# Altium PCB PCB1.PcbDoc
Units mm, origin at the board's own origin, x right, y up, seen from the top; angles counter-clockwise.
Board outline 91.57 x 98.81 mm, 2 copper layers (Top Layer, Bottom Layer); 2 components, 2 nets, 84 pads, 4 vias.
Unrouted connection lines stored in the file: 2.
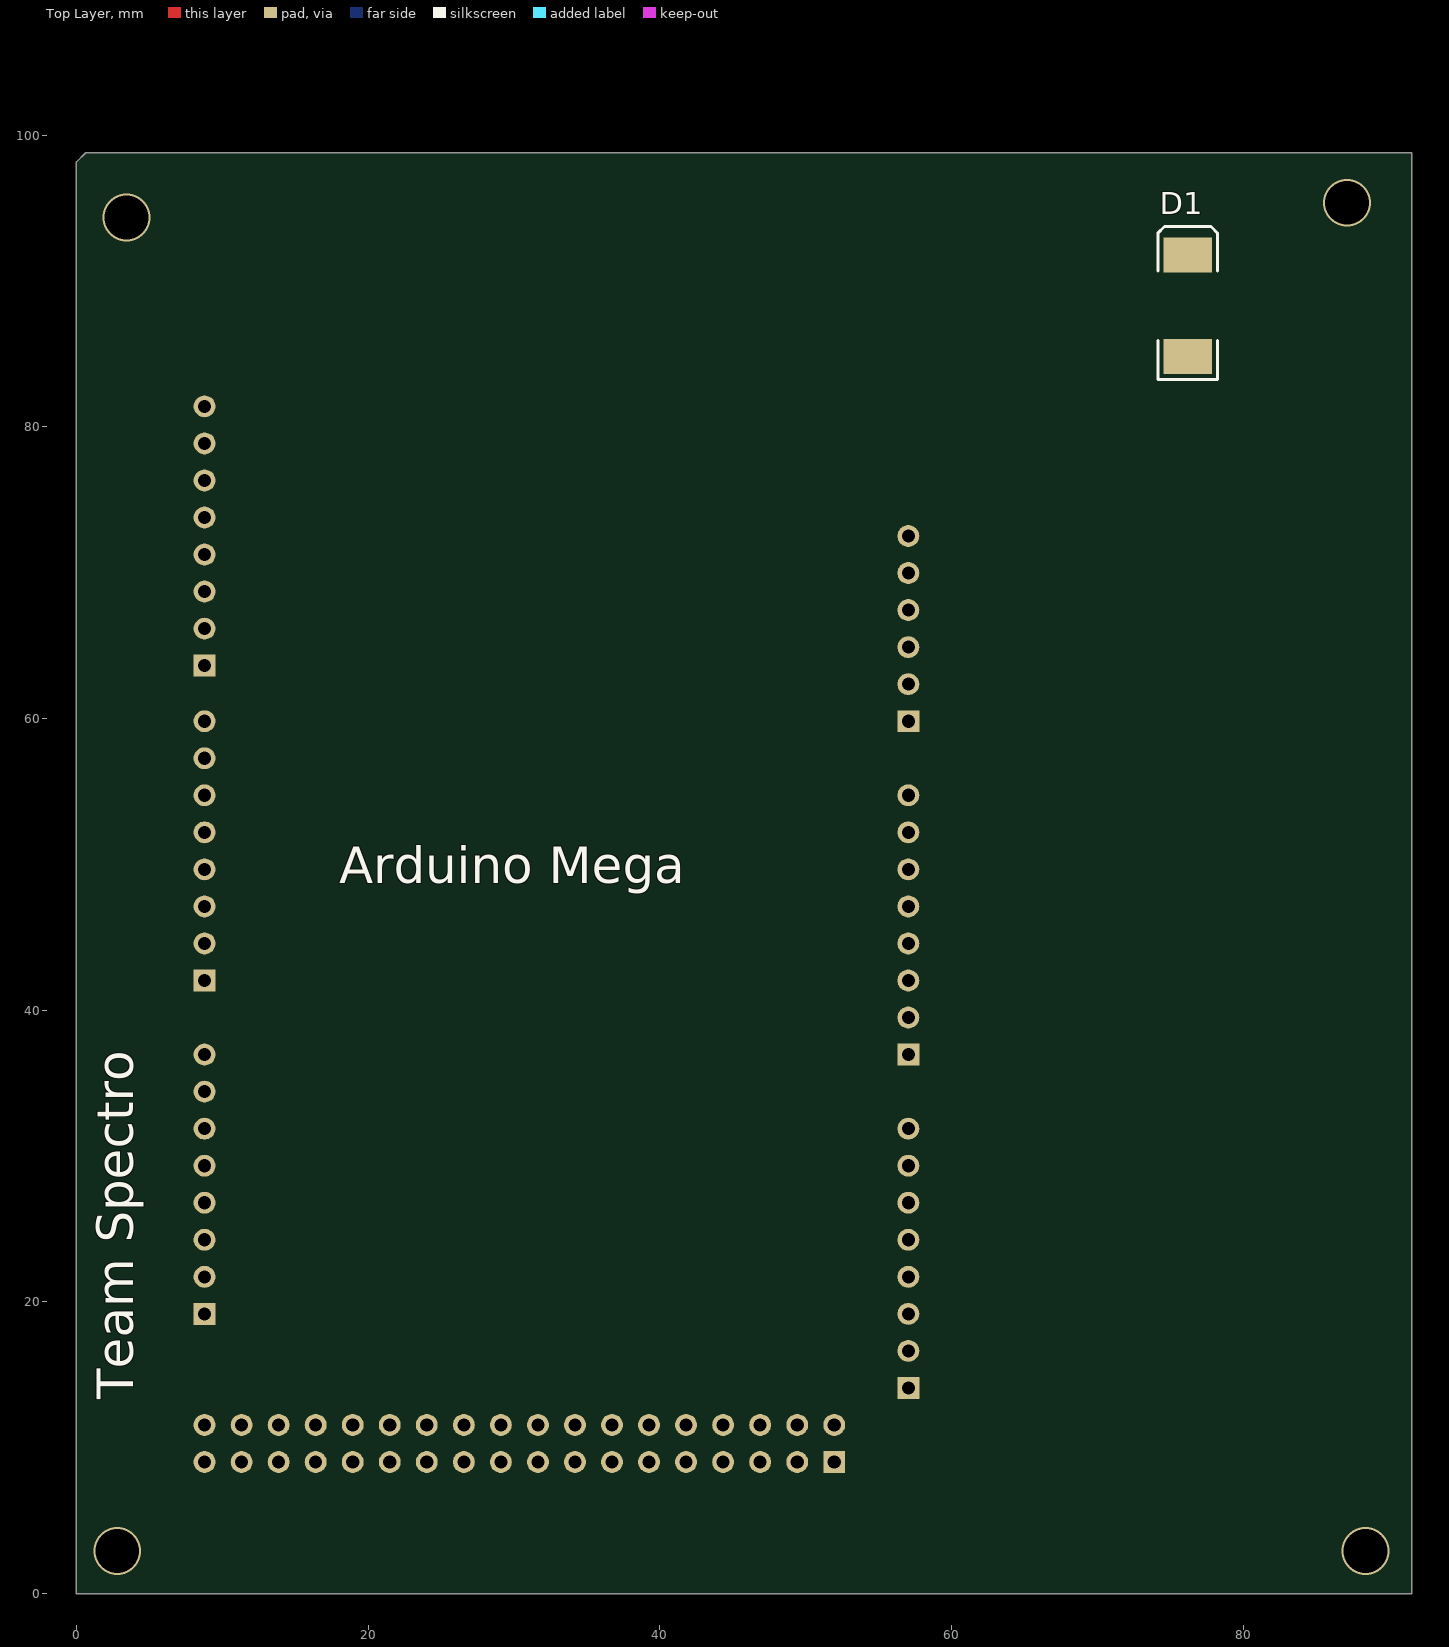
[diagram p0: Top Layer view]
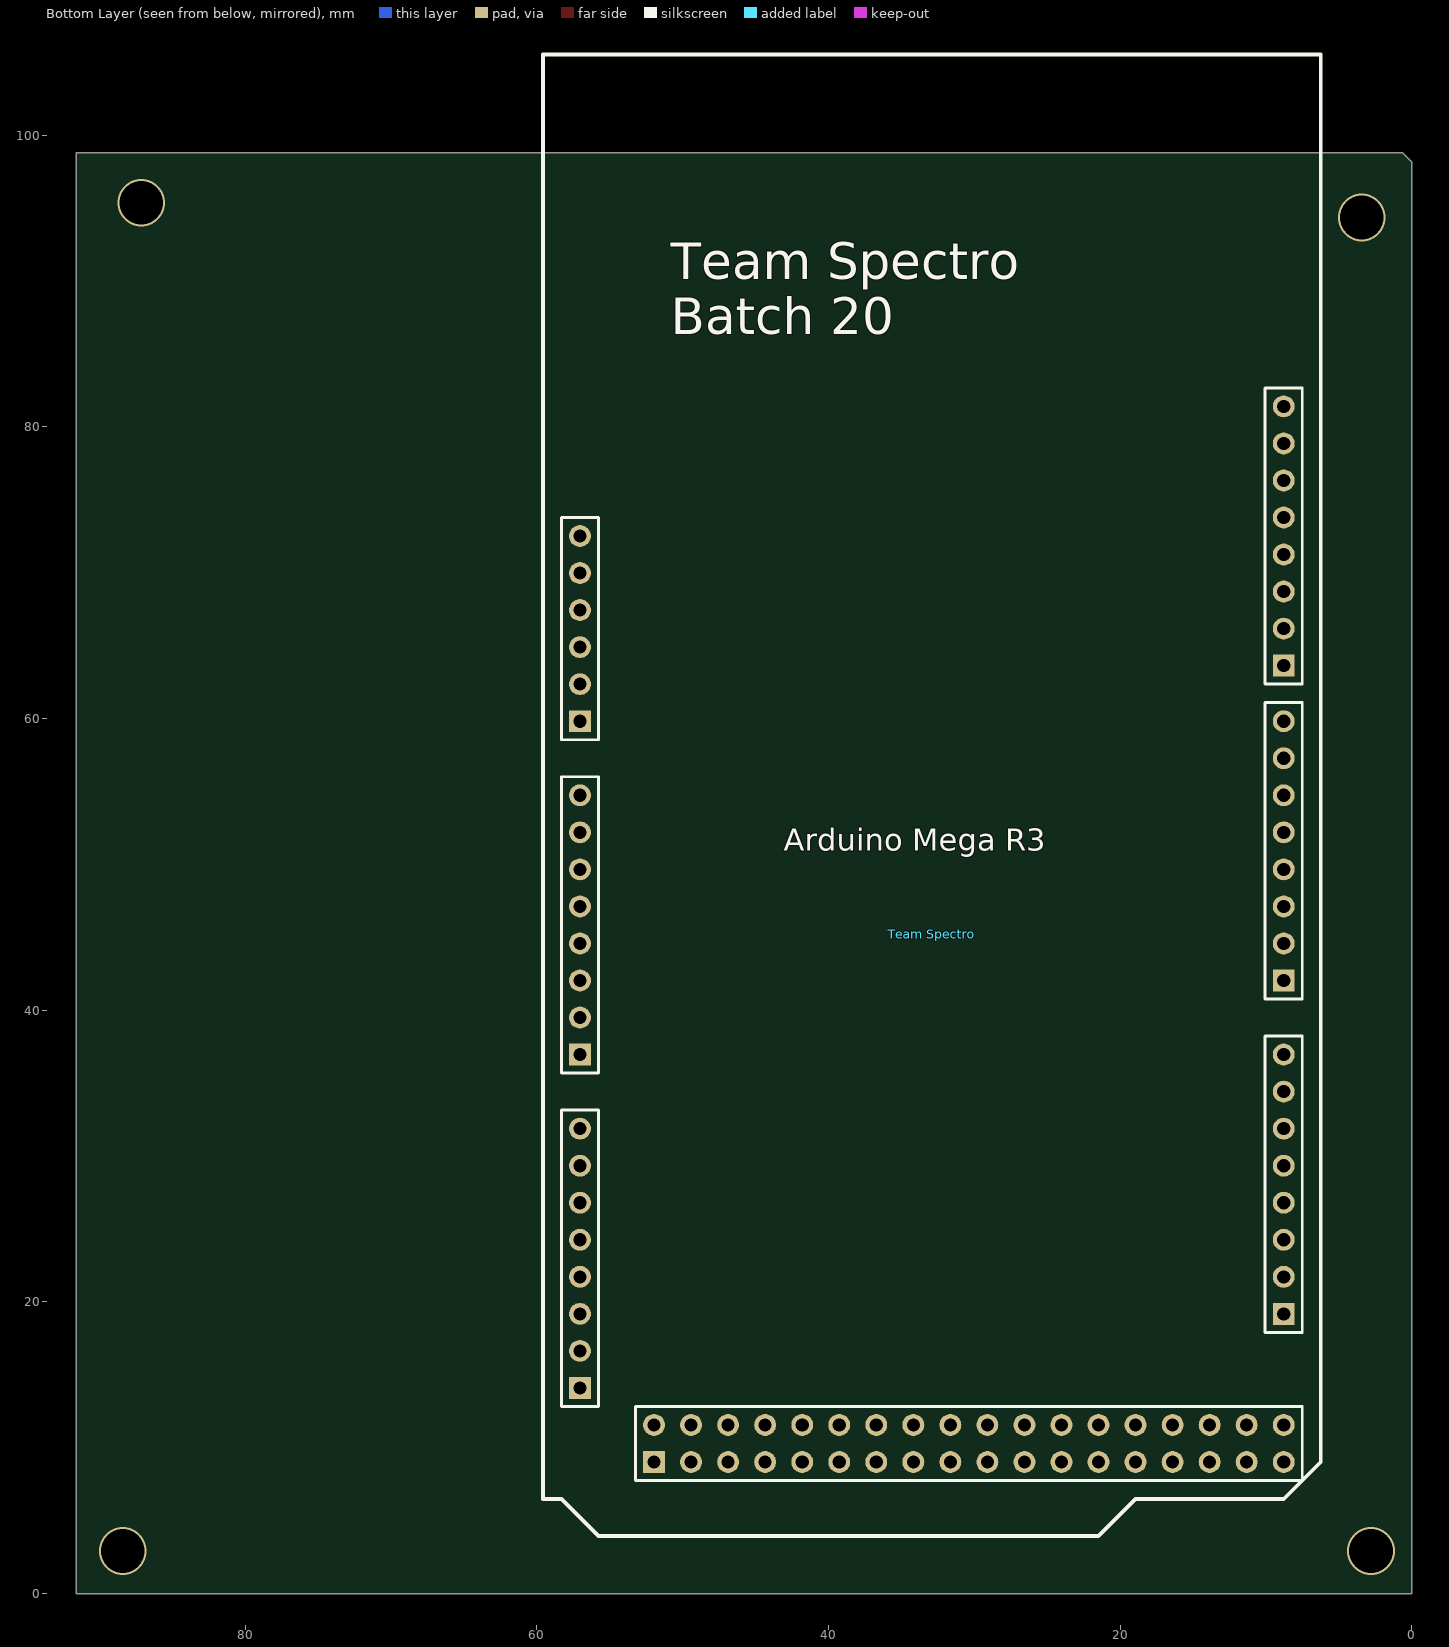
[diagram p1: Bottom Layer view, seen from below]

## Layer stack, top to bottom
Top Solder: solder mask 0.0102, Solder Resist, Dk 3.5
Top Layer: signal copper 0.0356
Dielectric 1: dielectric 0.32, FR-4, Dk 4.8
Bottom Layer: signal copper 0.0356
Bottom Solder: solder mask 0.0102, Solder Resist, Dk 3.5

## Board outline
0,0 0,98.171 0.635,98.806 91.567,98.806 91.567,0

## Design rules (kind name [scope] priority, off if disabled: settings)
Clearance [All] p1: gap=0.254 ignorepadtopadclearanceinfootprint=FALSE except(0: Arc-Hole Track-Hole SMDPad-Hole THPad-Hole Via-Hole Fill-Hole Poly-Hole Region-Hole Text-Hole)
PolygonConnect [All] p1: connectstyle=Relief reliefconductorwidth=0.254 reliefentries=4 polygonreliefangle="90 Angle" airgapwidth=0.254
RoutingVias [All] p1: holewidth=0.711 width=1.27 viastyle="Through Hole" minholewidth=0.711 minwidth=1.27 maxholewidth=0.711 maxwidth=1.27
SolderMaskExpansion [All] p1: expansion=0.102 istentingtop=FALSE
Width [All] p1: maxlimit=0.254 minlimit=0.254 preferedwidth=0.254
30 further rules are at their usual default settings.

## Components (designator, comment, footprint, x,y, rotation, side; value= is the part's Value field where it differs from the comment)
D1 "Diode" SMC 76.2,88.311 r90 top
"Team Spectro" "*" "Arduino Mega" 31.642,52.197 r270 bottom (schematic designator "Arduino Mega")

## Footprints (in the part's own frame and the unit in brackets; to place one, negate y for a bottom-side part, rotate by r counter-clockwise, add the part's x,y. Pads: shape width x height; smd on the part's side, far side on the other; paste and mask are expansions set on the pad)
"Arduino Mega" [mm] "Arduino Mega 2560"
  rect 1.5x1.5 hole 0.9: 0(10.16,22.86) 8(-11.43,22.86) 21(33.02,22.86) 59(-7.62,-25.4) 67(15.24,-25.4) 75(38.1,-25.4) 79(43.18,-20.32)
  round 1.5 hole 0.9: 1(7.62,22.86) 2(5.08,22.86) 3(2.54,22.86) 4(0,22.86) 5(-2.54,22.86) 6(-5.08,22.86) 7(-7.62,22.86) 9(-13.97,22.86) 10(-16.51,22.86) 11(-19.05,22.86) 12(-21.59,22.86) 13(-24.13,22.86) 14(15.24,22.86) 15(17.78,22.86) 16(20.32,22.86) 17(22.86,22.86) 18(25.4,22.86) 19(27.94,22.86) 20(30.48,22.86) 22(40.64,20.32) 23(43.18,20.32) 24(40.64,17.78) 25(43.18,17.78) 26(40.64,15.24) 27(43.18,15.24) 28(40.64,12.7) 29(43.18,12.7) 30(40.64,10.16) 31(43.18,10.16) 32(40.64,7.62) 33(43.18,7.62) 34(40.64,5.08) 35(43.18,5.08) 36(40.64,2.54) 37(43.18,2.54) 38(40.64,0) 39(43.18,0) 40(40.64,-2.54) 41(43.18,-2.54) 42(40.64,-5.08) 43(43.18,-5.08) 44(40.64,-7.62) 45(43.18,-7.62) 46(40.64,-10.16) 47(43.18,-10.16) 48(40.64,-12.7) 49(43.18,-12.7) 50(40.64,-15.24) 51(43.18,-15.24) 52(40.64,-17.78) 53(43.18,-17.78) 54(-20.32,-25.4) 55(-17.78,-25.4) 56(-15.24,-25.4) 57(-12.7,-25.4) 58(-10.16,-25.4) 60(-2.54,-25.4) 61(0,-25.4) 62(2.54,-25.4) 63(5.08,-25.4) 64(7.62,-25.4) 65(10.16,-25.4) 66(12.7,-25.4) 68(20.32,-25.4) 69(22.86,-25.4) 70(25.4,-25.4) 71(27.94,-25.4) 72(30.48,-25.4) 73(33.02,-25.4) 74(35.56,-25.4) 76(-26.67,22.86) 77(-29.21,22.86) 78(40.64,-20.32) 80(43.18,22.86) 81(40.64,22.86)
  silkscreen extent -53.34,-27.94 48.26,25.4
SMC [mm] "DO-214-AB/SMC; 2 C-Bend Leads; Body 7.9 x 5.9 mm, inc. leads (LxW)"
  rect 2.4x3.3 smd: 1(-3.475,0) 2(3.475,0)
  silkscreen extent -5.07,-2.05 5.43,2.05

## Part data
D1: "Default Diode", Code_JEDEC=DO-214-AB, LatestRevisionDate=17-Jul-2002, LatestRevisionNote="Re-released for DXP Platform.", PackageDescription="DO-214-AB/SMC; 2 C-Bend Leads; Body 7.9 x 5.9 mm, inc. leads (LxW)", PackageReference=SMC, PackageVersion=Sep-1996, Published=8-Jun-2000, Publisher="Altium Limited"
"Team Spectro": library part "ARDUINO MEGA"

## Via types
v1: diameter 3.27, hole 3, Top Layer to Bottom Layer, 4 vias

## Nets (pads, with @x,y where several pads share a name; then routed paths per layer and width w, separated by ;. In a path a pad name is that pad's centre, name@x,y a point inside that pad or via, vN(x,y) a via of type N, cw(c..) or ccw(c..) an arc to the next point about the centre after c; other vN are vias at no path point)
"NetArduino Mega?_11": "Team Spectro.11" D1.1
"NetArduino Mega?_77": "Team Spectro.77" D1.2
pads on no net: "Team Spectro.0" "Team Spectro.1" "Team Spectro.2" "Team Spectro.3" "Team Spectro.4" "Team Spectro.5" "Team Spectro.6" "Team Spectro.7" "Team Spectro.8" "Team Spectro.9" "Team Spectro.10" "Team Spectro.12" "Team Spectro.13" "Team Spectro.14" "Team Spectro.15" "Team Spectro.16" "Team Spectro.17" "Team Spectro.18" "Team Spectro.19" "Team Spectro.20" "Team Spectro.21" "Team Spectro.22" "Team Spectro.23" "Team Spectro.24" "Team Spectro.25" "Team Spectro.26" "Team Spectro.27" "Team Spectro.28" "Team Spectro.29" "Team Spectro.30" "Team Spectro.31" "Team Spectro.32" "Team Spectro.33" "Team Spectro.34" "Team Spectro.35" "Team Spectro.36" "Team Spectro.37" "Team Spectro.38" "Team Spectro.39" "Team Spectro.40" "Team Spectro.41" "Team Spectro.42" "Team Spectro.43" "Team Spectro.44" "Team Spectro.45" "Team Spectro.46" "Team Spectro.47" "Team Spectro.48" "Team Spectro.49" "Team Spectro.50" "Team Spectro.51" "Team Spectro.52" "Team Spectro.53" "Team Spectro.54" "Team Spectro.55" "Team Spectro.56" "Team Spectro.57" "Team Spectro.58" "Team Spectro.59" "Team Spectro.60" "Team Spectro.61" "Team Spectro.62" "Team Spectro.63" "Team Spectro.64" "Team Spectro.65" "Team Spectro.66" "Team Spectro.67" "Team Spectro.68" "Team Spectro.69" "Team Spectro.70" "Team Spectro.71" "Team Spectro.72" "Team Spectro.73" "Team Spectro.74" "Team Spectro.75" "Team Spectro.76" "Team Spectro.78" "Team Spectro.79" "Team Spectro.80" "Team Spectro.81"
copper on no net:
  other v1: 2.794,2.921 88.392,2.921 3.429,94.361 87.122,95.377

## Silkscreen, mask and mechanical layers (free items; w line width, h text height)
Top Overlay:
  text "Arduino Mega" at 18.034,48.712 h2.5
Bottom Overlay:
  text "Team Spectro / Batch 20" at 50.8,86.36 h2.5

## Text inside footprints (layer, text, board x,y; h text height)
"Team Spectro": Bottom Overlay "Arduino Mega R3" at 43.072,50.927 h1.52